# EAGLE board SmoothieDriver-DC3 (EAGLE 6.3)
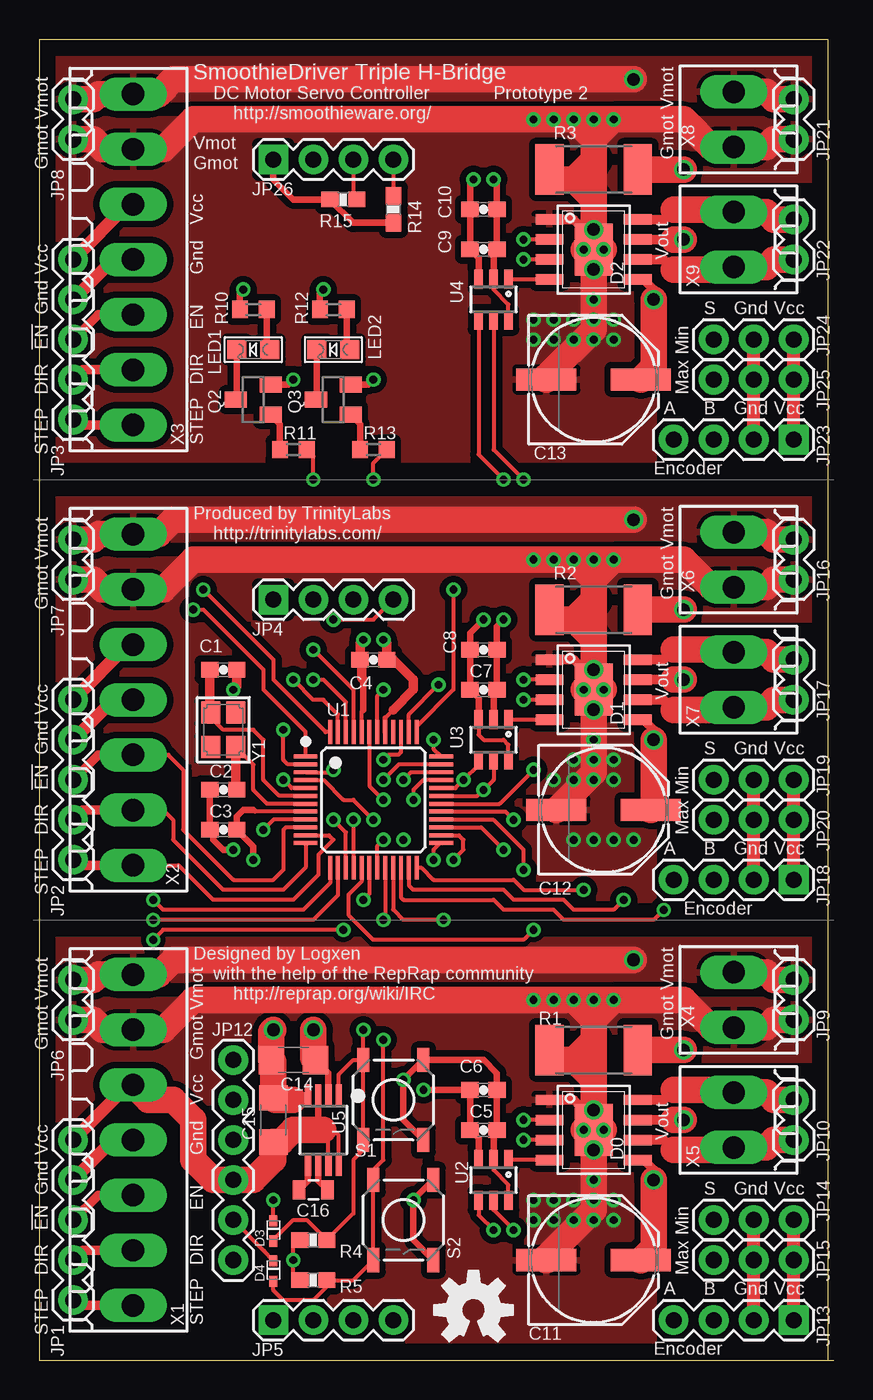
[diagram p0: board, top side]
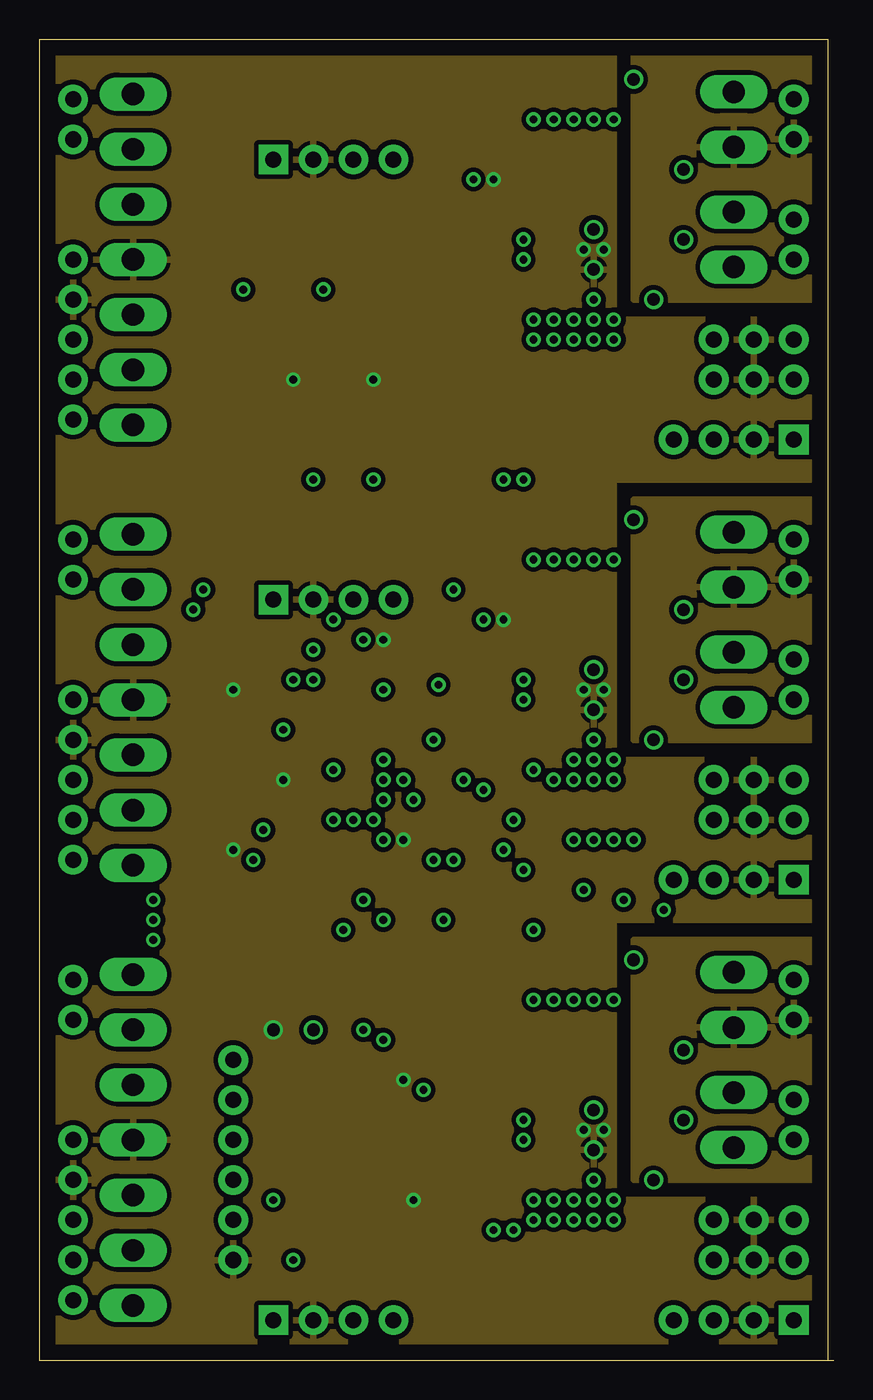
[diagram p1: board, inner layer Route2]
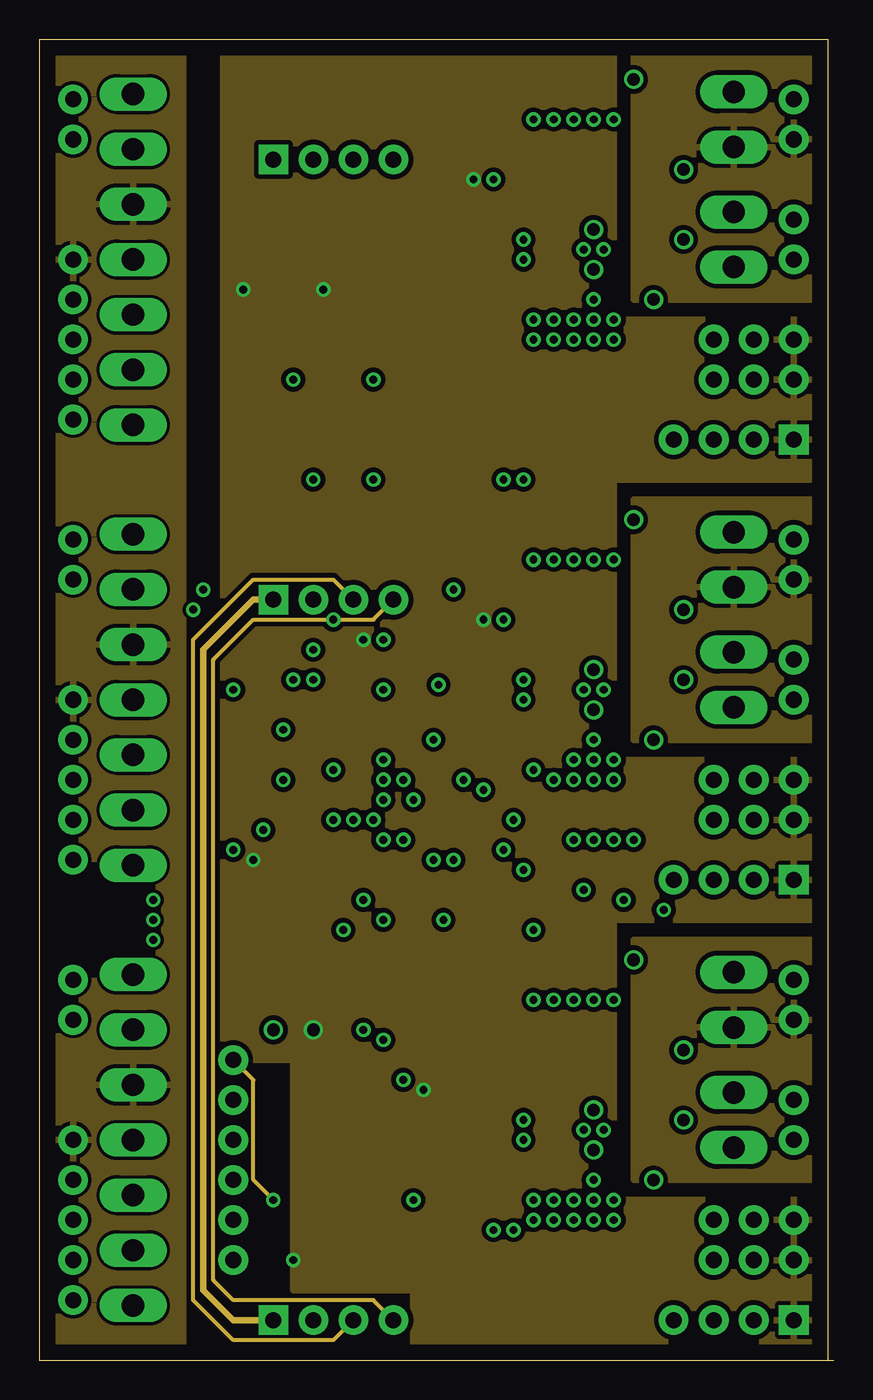
[diagram p2: board, inner layer Route3]
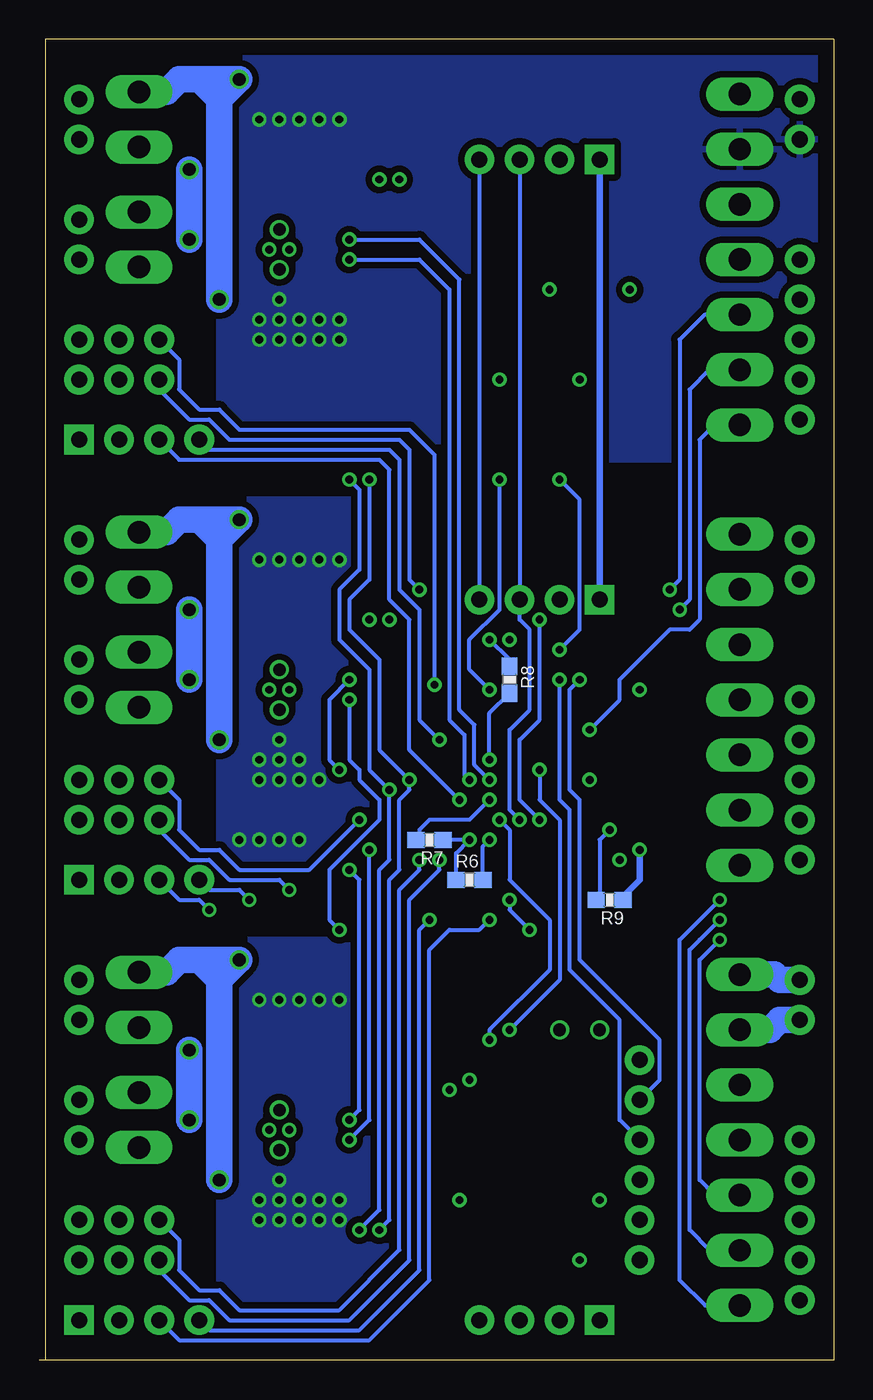
[diagram p3: board, bottom side, seen from below]

Size 50.38 x 83.82 mm. Coordinates in mm from the lower left corner, seen from the top.
Outline: 50,0 0,0 0,83.82 50,83.82 50,0
Outline: 50,0 50.38,0
Copper layers (1*2*3*16): Top 0.035mm / dielectric 0.5mm / Route2 0.017mm / dielectric 0.5mm / Route3 0.017mm / dielectric 0.5mm / Bottom 0.035mm
Design rules "default *": minimum track width 8mil, minimum drill 19mil, track to track 8mil, track to pad 8mil, pad to pad 8mil, via to via 8mil, smd to smd 0mil, copper to edge 40mil, drill to drill 8mil, minimum pad ring 8mil, minimum via ring 8mil, stop-mask expansion 4mil, vias tented up to drill 0mil, thermal gap 10mil

## Footprints (pad centres in the part's own frame; a part is rotated, then mirrored left to right if it is on the bottom)
0603-CAP = smd 1.1 x 1: 1 -0.85,0; 2 0.85,0
PANASONIC_E = smd 3.8 x 1.4: + 3,0; - -3,0
1206 = smd 1.6 x 1.8: 1 -1.4,0; 2 1.4,0
0805 = smd 0.8 x 1.2: 1 -0.9,0; 2 0.9,0
SOICN8-PAD = smd 0.65 x 1.75: 1 -1.905,-2.8; 2 -0.635,-2.8; 3 0.635,-2.8; 4 1.905,-2.8; 5 1.905,2.8; 6 0.635,2.8; 7 -0.635,2.8; 8 -1.905,2.8 | smd 3.3 x 2.41: PAD 0,0
NET_LINK = drill 0.8: P$1 0,0; P$2 0,0
SOD523 = smd 0.7 x 0.5: A 0.7,0; C -0.6,0
1X05 = drill 1.016 pad 1.88: 1 0,0; 2 2.54,0; 3 5.08,0; 4 7.62,0; 5 10.16,0
1X04 = drill 1.016 pad 1.88 square: 1 0,0 | drill 1.016 pad 1.88: 2 2.54,0; 3 5.08,0; 4 7.62,0
1X02 = drill 1.016 pad 1.88: 1 0,0; 2 2.54,0
1X06 = drill 1.016 pad 1.88: 1 0,0; 2 2.54,0; 3 5.08,0; 4 7.62,0; 5 10.16,0; 6 12.7,0
1X03 = drill 1.016 pad 1.88: 1 0,0; 2 2.54,0; 3 5.08,0
CHIPLED_0805 = smd 1.2 x 1.2: A 0,-1.05; C 0,1.05
SOT23 = smd 1 x 1.4: 1 -0.95,-1.1; 2 0.95,-1.1; 3 0,1.1
R2512 = smd 1.8 x 3.2: 1 -2.8,0; 2 2.8,0
0603-RES = smd 1.1 x 1: 1 -0.85,0; 2 0.85,0
R0603 = smd 1 x 1.1: 1 -0.85,0; 2 0.85,0
TACTILE_SWITCH_SMD = smd 1.524 x 0.762: 1 -2.54,1.905; 2 2.54,1.905; 3 -2.54,-1.905; 4 2.54,-1.905
LQFP48 = smd 1.5 x 0.25: 1 -4.3,2.75; 2 -4.3,2.25; 3 -4.3,1.75; 4 -4.3,1.25; 5 -4.3,0.75; 6 -4.3,0.25; 7 -4.3,-0.25; 8 -4.3,-0.75; 9 -4.3,-1.25; 10 -4.3,-1.75; 11 -4.3,-2.25; 12 -4.3,-2.75; 25 4.3,-2.75; 26 4.3,-2.25; 27 4.3,-1.75; 28 4.3,-1.25; 29 4.3,-0.75; 30 4.3,-0.25; 31 4.3,0.25; 32 4.3,0.75; 33 4.3,1.25; 34 4.3,1.75; 35 4.3,2.25; 36 4.3,2.75 | smd 0.25 x 1.5: 13 -2.75,-4.3; 14 -2.25,-4.3; 15 -1.75,-4.3; 16 -1.25,-4.3; 17 -0.75,-4.3; 18 -0.25,-4.3; 19 0.25,-4.3; 20 0.75,-4.3; 21 1.25,-4.3; 22 1.75,-4.3; 23 2.25,-4.3; 24 2.75,-4.3; 37 2.75,4.3; 38 2.25,4.3; 39 1.75,4.3; 40 1.25,4.3; 41 0.75,4.3; 42 0.25,4.3; 43 -0.25,4.3; 44 -0.75,4.3; 45 -1.25,4.3; 46 -1.75,4.3; 47 -2.25,4.3; 48 -2.75,4.3
SOT23-6 = smd 0.55 x 1.2: 1 -0.95,-1.3; 2 0,-1.3; 3 0.95,-1.3; 4 0.95,1.3; 5 0,1.3; 6 -0.95,1.3
MSOP8_0.65MM = smd 0.4 x 1.4: 1 -0.975,-2.2; 2 -0.325,-2.2; 3 0.325,-2.2; 4 0.975,-2.2; 5 0.975,2.2; 6 0.325,2.2; 7 -0.325,2.2; 8 -0.975,2.2
180-7 = drill 1.422 long: 1 -10.5,0; 2 -7,0; 3 -3.5,0; 4 0,0; 5 3.5,0; 6 7,0; 7 10.5,0
180-2 = drill 1.422 long: 1 -1.75,0; 2 1.75,0
CRYSTAL_3.2X2.5 = smd 1.4 x 1.2: 1 -1.1,-0.8; 2 1.1,0.8; GND1 -1.1,0.8; GND2 1.1,-0.8

## Placement (x,y rotation side)
C1  18pF  [0603-CAP]  11.66,43.81 180 top
C2  18pF  [0603-CAP]  11.66,36.2 0 top
C3  0.1uF  [0603-CAP]  11.66,33.66 0 top
C4  0.1uF  [0603-CAP]  21.19,44.45 180 top
C5  0.1uF  [0603-CAP]  28.18,14.61 0 top
C6  10uF  [0603-CAP]  28.18,17.14 0 top
C7  0.1uF  [0603-CAP]  28.18,42.55 0 top
C8  10uF  [0603-CAP]  28.18,45.09 0 top
C9  0.1uF  [0603-CAP]  28.18,70.48 0 top
C10  10uF  [0603-CAP]  28.18,73.03 0 top
C11  100uF  [PANASONIC_E]  35.16,6.35 0 top
C12  100uF  [PANASONIC_E]  35.8,34.92 0 top
C13  100uF  [PANASONIC_E]  35.16,62.23 0 top
C14  10uF  [1206]  16.11,19.05 180 top
C15  10uF  [1206]  14.84,15.24 90 top
C16  1uF  [0805]  17.38,10.79 180 top
D0  A4950  [SOICN8-PAD]  35.16,14.61 270 top
D0_GMOT  NET_LINK  [NET_LINK]  35.16,15.88 0 top
D1  A4950  [SOICN8-PAD]  35.16,42.55 270 top
D2  A4950  [SOICN8-PAD]  35.16,70.48 270 top
D3  1N4148  [SOD523]  14.84,8.26 270 top
D4  1N4148  [SOD523]  14.84,5.71 270 top
JP1  LOGIC_0  [1X05]  2.14,13.97 270 top
JP2  LOGIC_1  [1X05]  2.14,41.91 270 top
JP3  LOGIC_2  [1X05]  2.14,69.85 270 top
JP4  I2C  [1X04]  14.84,48.26 0 top
JP5  I2C  [1X04]  14.84,2.54 0 top
JP6  VMOT  [1X02]  2.14,24.13 270 top
JP7  VMOT  [1X02]  2.14,52.07 270 top
JP8  VMOT  [1X02]  2.14,80.01 270 top
JP9  D0_PWR  [1X02]  47.86,24.13 270 top
JP10  D0_OUT  [1X02]  47.86,13.97 90 top
JP12  UART  [1X06]  12.3,6.35 90 top
JP13  D0_ENC  [1X04]  47.86,2.54 180 top
JP14  D0_MIN  [1X03]  47.86,8.89 180 top
JP15  D0_MAX  [1X03]  47.86,6.35 180 top
JP16  D1_PWR  [1X02]  47.86,52.07 270 top
JP17  D1_OUT  [1X02]  47.86,41.91 90 top
JP18  D1_ENC  [1X04]  47.86,30.48 180 top
JP19  D1_MIN  [1X03]  47.86,36.83 180 top
JP20  D1_MAX  [1X03]  47.86,34.29 180 top
JP21  D2_PWR  [1X02]  47.86,80.01 270 top
JP22  D2_OUT  [1X02]  47.86,69.85 90 top
JP23  D2_ENC  [1X04]  47.86,58.42 180 top
JP24  D2_MIN  [1X03]  47.86,64.77 180 top
JP25  D2_MAX  [1X03]  47.86,62.23 180 top
JP26  I2C  [1X04]  14.84,76.2 0 top
LED1  20mA  [CHIPLED_0805]  13.57,64.14 90 top
LED2  20mA  [CHIPLED_0805]  18.65,64.14 90 top
Q2  25mA  [SOT23]  13.57,60.96 90 top
Q3  25mA  [SOT23]  18.65,60.96 90 top
R1  0.1 Ohm  [R2512]  35.16,19.68 0 top
R2  0.1 Ohm  [R2512]  35.16,47.62 0 top
R3  0.1 Ohm  [R2512]  35.16,75.56 0 top
R4  10kOhm  [0603-RES]  17.38,7.62 180 top
R5  10kOhm  [0603-RES]  17.38,5.08 180 top
R6  ADD0  [0603-RES]  23.1,30.48 0 bottom
R7  ADD1  [0603-RES]  25.64,33.02 180 bottom
R8  ADD2  [0603-RES]  20.55,43.18 270 bottom
R9  ADD3  [0603-RES]  14.21,29.21 180 bottom
R10  75 Ohm  [R0603]  13.57,66.67 0 top
R11  1200 Ohm  [R0603]  16.11,57.78 0 top
R12  75 Ohm  [R0603]  18.65,66.67 0 top
R13  1200 Ohm  [R0603]  21.19,57.78 0 top
R14  NP  [0603-RES]  22.46,73.03 270 top
R15  NP  [0603-RES]  19.29,73.66 180 top
S1  RESET  [TACTILE_SWITCH_SMD]  22.46,16.51 270 top
S2  ISP  [TACTILE_SWITCH_SMD]  23.1,8.89 270 top
U1  LPC1114FBD48  [LQFP48]  21.19,35.56 0 top
U2  MCP4725A0  [SOT23-6]  28.81,11.43 180 top
U3  MCP4725A0  [SOT23-6]  28.81,39.37 180 top
U4  MCP4725A1  [SOT23-6]  28.81,67.31 180 top
U5  MCP1252-33X40I/MS  [MSOP8_0.65MM]  18.02,14.61 180 top
U$15  OSHW-LOGOM  [OSHW-LOGO-M]  27.54,3.17 0 top
U$22  NET_LINK  [NET_LINK]  35.16,13.34 180 bottom
U$23  NET_LINK  [NET_LINK]  35.16,43.81 0 top
U$24  NET_LINK  [NET_LINK]  35.16,41.27 0 top
U$25  NET_LINK  [NET_LINK]  35.16,69.22 0 top
U$26  NET_LINK  [NET_LINK]  35.16,71.75 0 top
X1  DRIVER_0  [180-7]  5.95,13.97 270 top
X2  DRIVER_1  [180-7]  5.95,41.91 270 top
X3  DRIVER_2  [180-7]  5.95,69.85 270 top
X4  D0_PWR  [180-2]  44.05,22.86 90 top
X5  D0_OUT  [180-2]  44.05,15.24 90 top
X6  D1_PWR  [180-2]  44.05,50.8 90 top
X7  D1_OUT  [180-2]  44.05,43.18 90 top
X8  D2_PWR  [180-2]  44.05,78.74 90 top
X9  D2_OUT  [180-2]  44.05,71.12 90 top
Y1  12MHz  [CRYSTAL_3.2X2.5]  11.66,40.01 90 top

## Library data of the parts
C1-C16 = SparkFun-Capacitors
D0 D0_GMOT D1 D2 U5 U$22-U$26 = logxen
D3 D4 = SparkFun-DiscreteSemi
JP1-JP10 JP12-JP26 = SparkFun-Connectors
LED1 LED2 U1-U4 Y1 = microbuilder
Q2 Q3 = SparkFun
R1-R9 R14 R15 = SparkFun-Resistors
R10-R13 = rcl
S1 S2 = SparkFun-Electromechanical
U$15 = SparkFun-Aesthetics
X1-X9 = con-weidmueller-sl35; OC_FARNELL: unknown; OC_NEWARK: unknown

## Nets
ACC_SCL: U1.31 U2.5 U3.5 U4.5
ACC_SDA: U1.32 U2.4 U3.4 U4.4
ADD0: R6.2 U1.19
ADD1: R7.2 U1.43
ADD2: R8.2 U1.39
ADD3: R9.2 U1.9
D0_DIR: JP1.4 U1.14 X1.6
D0_EN: JP1.3 U1.18 X1.5
D0_ENC1: JP13.3 U1.20
D0_ENC2: JP13.4 U1.21
D0_GMOT: C11.- D0.1 D0_GMOT.P$1 JP6.2 JP9.2 X1.2 X4.1
D0_IN1: D0.3 U1.27
D0_IN2: D0.2 U1.28
D0_LSS: D0.7 R1.2
D0_MAX: JP15.3 U1.25
D0_MIN: JP14.3 U1.26
D0_OUT1: D0.6 JP10.1 X5.1
D0_OUT2: D0.8 JP10.2 X5.2
D0_STEP: JP1.5 U1.13 X1.7
D0_VMOT: C11.+ D0.5 JP6.1 JP9.1 X1.1 X4.2
D0_VREF: D0.4 U2.1
D1_DIR: JP2.4 U1.12 X2.6
D1_EN: JP2.3 U1.10 X2.5
D1_ENC1: JP18.3 U1.22
D1_ENC2: JP18.4 U1.23
D1_GMOT: C12.- D1.1 JP7.2 JP16.2 U$23.P$1 X2.2 X6.1
D1_IN1: D1.3 U1.17
D1_IN2: D1.2 U1.30
D1_LSS: D1.7 R2.2
D1_LSS1: D2.7 R3.2
D1_MAX: JP20.3 U1.24
D1_MIN: JP19.3 U1.29
D1_OUT1: D1.6 JP17.1 X7.1
D1_OUT2: D1.8 JP17.2 X7.2
D1_STEP: JP2.5 U1.11 X2.7
D1_VMOT: C12.+ D1.5 JP7.1 JP16.1 X2.1 X6.2
D1_VREF: D1.4 U3.1
D2_DIR: JP3.4 U1.1 X3.6
D2_EN: JP3.3 U1.48 X3.5
D2_ENC1: JP23.3 U1.33
D2_ENC2: JP23.4 U1.36
D2_GMOT: C13.- D2.1 JP8.2 JP21.2 U$26.P$1 X3.2 X8.1
D2_IN1: D2.3 U1.34
D2_IN2: D2.2 U1.35
D2_MAX: JP25.3 U1.37
D2_MIN: JP24.3 U1.38
D2_OUT1: D2.6 JP22.1 X9.1
D2_OUT2: D2.8 JP22.2 X9.2
D2_STEP: JP3.5 U1.2 X3.7
D2_VMOT: C13.+ D2.5 JP8.1 JP21.1 X3.1 X8.2
D2_VREF: D2.4 U4.1
DTR: D3.C JP12.6
GND: C1.1 C2.1 C3.1 C4.1 C5.2 C6.2 C7.2 C8.2 C9.2 C10.2 C14.2 C15.2 D0.PAD D0_GMOT.P$2 D1.PAD D2.PAD JP1.2 JP2.2 JP3.2 JP4.2 JP5.2 JP12.1 JP13.2 JP14.2 JP15.2 JP18.2 JP19.2 JP20.2 JP23.2 JP24.2 JP25.2 JP26.2 Q2.2 Q3.2 R1.1 R2.1 R3.1 R6.1 R7.1 R8.1 R9.1 S1.1 S1.2 S2.1 S2.2 U1.5 U1.41 U2.2 U2.6 U3.2 U4.2 U4.6 U5.4 U$22.P$1 U$22.P$2 U$23.P$2 U$24.P$1 U$24.P$2 U$25.P$1 U$25.P$2 U$26.P$2 X1.4 X2.4 X3.4
IRQ: U1.40
ISP: D4.A R5.1 S2.3 S2.4 U1.4
LED0: R11.2 U1.45
LED1: R13.2 U1.42
N$1: LED1.A R10.2
N$2: LED1.C Q2.3
N$6: Q2.1 R11.1
N$7: Q3.1 R13.1
N$9: LED2.A R12.2
N$10: LED2.C Q3.3
PWRREG_C+: C16.1 U5.6
PWRREG_C-: C16.2 U5.5
RESET: D3.A R4.1 S1.3 S1.4 U1.3 U5.1
RTS: D4.C JP12.2
RXD: JP12.4 U1.46
SCL: JP4.4 JP5.4 JP26.4 R14.1 U1.15
SDA: JP4.3 JP5.3 JP26.3 R15.1 U1.16
TXD: JP12.5 U1.47
VCC: C3.2 C4.2 C5.1 C6.1 C7.1 C8.1 C9.1 C10.1 C14.1 JP13.1 JP14.1 JP15.1 JP18.1 JP19.1 JP20.1 JP23.1 JP24.1 JP25.1 R4.2 R5.2 R10.1 R12.1 U1.8 U1.44 U2.3 U3.3 U3.6 U4.3 U5.2
VDD: JP4.1 JP5.1 JP26.1 R14.2 R15.2
VIN: C15.1 JP1.1 JP2.1 JP3.1 JP12.3 U5.3 U5.7 U5.8 X1.3 X2.3 X3.3
XTALIN: C1.2 U1.6 Y1.2
XTALOUT: C2.2 U1.7 Y1.1

## Tracks (layer width: path | path; a pad name or v marks a point on that pad's centre or on a via)
ACC_SCL  (via drill 0.5)
  Top 0.254: U4.5 28.81,57.78 v30.71,55.88 | U2.5 28.81,9.53 v30.08,8.26 | U1.31 27.79,35.81 v28.18,36.2 28.81,36.83 U3.5
  Bottom 0.254: v30.08,8.26 28.81,9.53 28.81,31.11 28.18,31.75 v28.18,36.2 29.45,37.47 29.45,43.81 31.35,45.72 31.35,48.9 30.08,50.16 30.08,55.24 v30.71,55.88
ACC_SDA  (via drill 0.5)
  Top 0.254: U4.4 27.86,57.47 v29.45,55.88 | U2.4 27.86,9.21 v28.81,8.26 | U3.4 27.86,37.78 v26.91,36.83 26.39,36.31 U1.32
  Bottom 0.254: v28.81,8.26 28.18,8.89 28.18,30.48 27.54,31.11 27.54,35.56 26.91,36.2 v26.91,36.83 28.81,38.73 28.81,44.45 30.71,46.35 30.71,48.26 29.45,49.53 v29.45,55.88
ADD0  (via drill 0.5)
  Top 0.254: U1.19 21.44,32.63 v21.83,33.02
  Bottom 0.254: 22.46,30.7 R6.2 22.25,32.6 v21.83,33.02
ADD1  (via drill 0.5)
  Top 0.254: U1.43 20.94,36.45 v21.83,35.56
  Bottom 0.254: v21.83,35.56 23.1,34.29 25.64,34.29 26.27,33.66 26.27,33.23 R7.2
ADD2  (via drill 0.5)
  Top 0.254: U1.39 22.94,38.58 22.78,38.42 22.14,38.42 v21.83,38.1
  Bottom 0.254: v21.83,38.1 21.83,41.06 R8.2
ADD3  (via drill 0.5)
  Top 0.254: U1.9 14.86,34.31 v14.21,33.66
  Bottom 0.254: v14.21,33.66 14.84,33.02 14.84,29.43 R9.2
D0_DIR  (via drill 0.5)
  Top 0.254: U1.14 18.94,29.5 17.38,27.94 v7.22,27.94
  Top 0.61: X1.6 2.76,6.97 JP1.4
  Bottom 0.254: X1.6 7.84,6.97 9.12,8.26 9.12,26.04 8.49,26.67 v7.22,27.94
D0_EN  (via drill 0.5)
  Top 0.254: U1.18 20.94,29.59 v20.55,29.21 | v19.29,27.3 7.86,27.3 v7.22,26.67
  Top 0.61: X1.5 3.72,10.47 JP1.3
  Bottom 0.254: X1.5 7.53,10.47 8.49,11.43 8.49,25.4 v7.22,26.67 | v20.55,29.21 20.55,28.57 v19.29,27.3
D0_ENC1  (via drill 0.5)
  Top 0.254: U1.20 21.94,28.05 v21.83,27.94
  Bottom 0.254: JP13.3 41.51,1.27 29.45,1.27 25.64,5.08 25.64,26.04 24.37,27.3 22.46,27.3 v21.83,27.94
D0_ENC2  (via drill 0.5)
  Top 0.254: v25.64,27.94 23.1,27.94 22.44,28.59 U1.21
  Bottom 0.254: JP13.4 39.61,1.91 30.08,1.91 26.27,5.71 26.27,27.3 v25.64,27.94
D0_GMOT  (via drill 0.5)
  Top 0.61: D0.1 33.89,16.51 34.52,15.88 D0_GMOT.P$1
  Top 1.676: JP9.2 46.59,21.59 46.11,21.11 X4.1 42.62,21.11 40.88,22.86 v36.43,22.86 | JP6.2 3.41,21.59 4.03,20.97 X1.2 7.87,20.97 9.76,22.86 v31.35,22.86 v32.62,22.86 v33.89,22.86 | v33.89,22.86 v35.16,22.86 v36.43,22.86 | C11.- 32.16,6.53 35.16,9.53 v35.16,10.16 v35.16,11.43 D0_GMOT.P$1 35.16,21.59 | v36.43,22.86 35.16,21.59 | v33.89,22.86 35.16,21.59
  Bottom 1.676: X1.2 4.03,20.97 3.41,21.59 JP6.2
  other vias: 31.35,8.89 31.35,10.16 32.62,10.16 32.62,8.89 33.89,8.89 33.89,10.16 35.16,8.89 36.43,8.89 36.43,10.16
  pour Route2 (isolate 0.305): 37.7,26.67 51.67,26.67 51.67,11.43 37.7,11.43
  pour Route3 (isolate 0.305): 37.7,26.67 51.67,26.67 51.67,11.43 37.7,11.43
  pour Top (isolate 0.406): -1.67,22.86 51.67,22.86 51.67,19.05 38.97,19.05 38.97,1.27 -1.67,1.27
  pour Bottom (isolate 0.406): 26.27,26.67 38.97,26.67 38.97,1.27 26.27,1.27
D0_IN1  (via drill 0.5)
  Top 0.254: D0.3 v30.71,13.97 | v29.45,32.38 28.02,33.81 U1.27
  Bottom 0.254: v30.71,13.97 29.45,15.24 v29.45,32.38
D0_IN2  (via drill 0.5)
  Top 0.254: D0.2 v30.71,15.24 | v30.71,31.11 30.71,32.38 28.79,34.31 U1.28
  Bottom 0.254: v30.71,15.24 30.08,15.88 30.08,30.48 v30.71,31.11
D0_LSS  (via drill 0.8)
  Top 0.61: D0.7 40.24,15.24
  Top 1.676: 40.24,15.24 v40.88,15.24 | v40.88,19.68 R1.2
  Bottom 1.676: v40.88,15.24 v40.88,19.68
D0_MAX  (via drill 0.5)
  Top 0.254: U1.25 25.43,32.81 25,32.38 v25,31.75
  Bottom 0.254: JP15.3 42.78,5.71 40.88,3.81 39.61,3.81 38.34,2.54 30.71,2.54 26.91,6.35 26.91,29.21 25,31.11 v25,31.75
D0_MIN  (via drill 0.5)
  Top 0.254: v26.27,31.75 26.91,32.38 26.91,33.02 26.62,33.31 U1.26
  Bottom 0.254: JP14.3 41.51,7.62 41.51,5.71 40.24,4.45 38.97,4.45 37.7,3.17 31.35,3.17 27.54,6.99 27.54,29.84 26.27,31.11 v26.27,31.75
D0_OUT1
  Top 0.61: D0.6 39.61,13.97 40.24,13.34
  Top 1.676: 40.24,13.34 43.9,13.34 X5.1 46.11,13.49 46.59,13.97 JP10.1
D0_OUT2
  Top 0.61: D0.8 39.61,16.51 40.24,17.14
  Top 1.676: 40.24,17.14 43.9,17.14 X5.2 46.11,16.99 46.59,16.51 JP10.2
D0_STEP  (via drill 0.5)
  Top 0.254: U1.13 18.44,30.27 16.75,28.57 7.86,28.57 v7.22,29.21
  Top 0.61: X1.7 2.48,3.47 JP1.5
  Bottom 0.254: X1.7 8.15,3.47 9.76,5.08 9.76,26.67 v7.22,29.21
D0_VMOT  (via drill 0.8)
  Top 0.61: D0.5 38.34,12.7 38.97,12.06 v38.97,11.43
  Top 1.676: X4.2 46.11,24.61 46.59,24.13 JP9.1 | JP6.1 3.41,24.13 3.75,24.47 X1.1 7.56,24.47 8.49,25.4 v37.7,25.4 | v38.97,11.43 38.97,7.16 C11.+
  Bottom 1.676: X1.1 3.75,24.47 3.41,24.13 JP6.1 | X4.2 42.3,24.61 41.51,25.4 40.24,25.4 | 40.24,25.4 v37.7,25.4 38.97,24.13 | 40.24,25.4 38.97,24.13 | 38.97,24.13 v38.97,11.43
  pour Top (isolate 0.305): -1.67,24.13 -1.67,26.67 51.67,26.67 51.67,24.13
D0_VREF
  Top 0.254: D0.4 29.79,12.7 U2.1
D1_DIR
  Top 0.254: X2.6 7.87,34.91 8.49,34.29 8.49,33.02 11.66,29.84 15.47,29.84 16.89,31.26 U1.12
  Top 0.61: X2.6 2.76,34.91 JP2.4
D1_EN
  Top 0.254: X2.5 8.18,38.41 9.12,37.47 9.12,33.66 12.3,30.48 14.84,30.48 15.47,31.11 15.47,33.66 15.63,33.81 U1.10
  Top 0.61: X2.5 3.72,38.41 JP2.3
D1_ENC1  (via drill 0.5)
  Top 0.254: v39.61,28.57 38.97,27.94 33.26,27.94 32.62,28.57 29.45,28.57 28.81,29.21 23.1,29.21 22.94,29.36 U1.22
  Bottom 0.254: JP18.3 41.51,29.21 40.24,29.21 v39.61,28.57
D1_ENC2  (via drill 0.5)
  Top 0.254: v37.07,29.21 36.43,28.57 33.89,28.57 33.26,29.21 30.08,29.21 29.45,29.84 23.73,29.84 23.44,30.14 U1.23
  Bottom 0.254: JP18.4 39.61,29.84 37.7,29.84 v37.07,29.21
D1_GMOT  (via drill 0.5)
  Top 0.61: D1.1 33.89,44.45 34.52,43.81 U$23.P$1
  Top 1.676: JP7.2 3.41,49.53 4.03,48.91 X2.2 7.87,48.91 9.76,50.8 v31.35,50.8 v32.62,50.8 v33.89,50.8 | JP16.2 46.59,49.53 46.11,49.05 X6.1 42.62,49.05 40.88,50.8 v36.43,50.8 | v33.89,50.8 v35.16,50.8 v36.43,50.8 | v36.43,50.8 35.16,49.53 | v33.89,50.8 35.16,49.53 | 35.16,49.53 U$23.P$1 v35.16,39.37 v35.16,38.1 35.16,37.29 C12.-
  other vias: 32.62,36.83 33.89,36.83 33.89,38.1 35.16,36.83 36.43,38.1 36.43,36.83 33.89,33.02 35.16,33.02 36.43,33.02 37.7,33.02
  pour Route2 (isolate 0.305): 37.7,54.61 51.67,54.61 51.67,39.37 37.7,39.37
  pour Route3 (isolate 0.305): 37.7,54.61 51.67,54.61 51.67,39.37 37.7,39.37
  pour Top (isolate 0.406): -1.67,50.8 51.67,50.8 51.67,46.99 38.97,46.99 38.97,29.21 -1.67,29.21
  pour Bottom (isolate 0.406): 26.27,54.61 26.27,27.94 38.97,27.94 38.97,54.61
D1_IN1  (via drill 0.5)
  Top 0.254: D1.3 v30.71,41.91 | v31.35,27.3 30.71,26.67 21.19,26.67 19.6,28.26 19.6,29.53 20.44,30.36 U1.17
  Bottom 0.254: v30.71,41.91 30.71,38.1 30.08,37.47 30.08,36.83 28.81,35.56 28.81,34.29 31.98,31.11 31.98,27.94 v31.35,27.3
D1_IN2  (via drill 0.5)
  Top 0.254: D1.2 v30.71,43.18 | v31.35,37.47 29.2,35.31 U1.30
  Bottom 0.254: v30.71,43.18 31.98,41.91 31.98,38.1 v31.35,37.47
D1_LSS  (via drill 0.8)
  Top 0.61: D1.7 40.24,43.18
  Top 1.676: 40.24,43.18 v40.88,43.18 | v40.88,47.62 R2.2
  Bottom 1.676: v40.88,43.18 v40.88,47.62
D1_LSS1  (via drill 0.8)
  Top 0.61: D2.7 40.24,71.12
  Top 1.676: 40.24,71.12 v40.88,71.12 | v40.88,75.56 R3.2
  Bottom 1.676: v40.88,71.12 v40.88,75.56
D1_MAX  (via drill 0.5)
  Top 0.254: U1.24 24.22,31.26 25,30.48 30.08,30.48 30.71,29.84 v34.52,29.84
  Bottom 0.254: JP20.3 42.78,33.66 40.88,31.75 39.61,31.75 38.34,30.48 35.16,30.48 v34.52,29.84
D1_MIN  (via drill 0.5)
  Top 0.254: U1.29 29.56,34.81 v30.08,34.29
  Bottom 0.254: JP19.3 41.51,35.56 41.51,33.66 40.24,32.38 38.97,32.38 37.7,31.11 33.26,31.11 32.62,31.75 v30.08,34.29
D1_OUT1
  Top 0.61: D1.6 39.61,41.91 40.24,41.27
  Top 1.676: JP17.1 46.59,41.91 46.11,41.43 X7.1 43.9,41.27 40.24,41.27
D1_OUT2
  Top 0.61: D1.8 39.61,44.45 40.24,45.09
  Top 1.676: JP17.2 46.59,44.45 46.11,44.93 X7.2 43.9,45.09 40.24,45.09
D1_STEP
  Top 0.254: X2.7 8.83,31.41 11.03,29.21 16.11,29.21 17.7,30.8 17.7,32.07 18.65,33.02 18.36,33.31 U1.11
  Top 0.61: X2.7 2.48,31.41 JP2.5
D1_VMOT  (via drill 0.8)
  Top 0.61: D1.5 38.34,40.64 38.97,40.01 v38.97,39.37
  Top 1.676: JP7.1 3.41,52.07 3.75,52.41 X2.1 7.56,52.41 8.49,53.34 v37.7,53.34 | X6.2 46.11,52.55 46.59,52.07 JP16.1 | v38.97,39.37 38.97,35.1 C12.+
  Bottom 1.676: 40.24,53.34 v37.7,53.34 38.97,52.07 | X6.2 42.3,52.55 41.51,53.34 40.24,53.34 | 40.24,53.34 38.97,52.07 | 38.97,52.07 v38.97,39.37
  pour Top (isolate 0.305): -1.67,54.61 51.67,54.61 51.67,52.07 -1.67,52.07
D1_VREF
  Top 0.254: D1.4 29.79,40.64 U3.1
D2_DIR  (via drill 0.5)
  Top 0.254: v9.76,47.62 10.39,47.62 14.21,43.81 14.21,42.55 16.89,39.86 U1.1
  Top 0.61: X3.6 2.76,62.85 JP3.4
  Bottom 0.254: X3.6 7.87,62.85 9.12,61.59 9.12,48.26 v9.76,47.62
D2_EN  (via drill 0.5)
  Top 0.254: v10.39,48.9 14.84,44.45 14.84,43.18 18.16,39.86 U1.48
  Top 0.61: X3.5 3.72,66.35 JP3.3
  Bottom 0.254: X3.5 8.18,66.35 9.76,64.77 9.76,49.53 v10.39,48.9
D2_ENC1  (via drill 0.5)
  Top 0.254: U1.33 24.35,36.81 23.73,36.2 v23.73,35.56
  Bottom 0.254: JP23.3 41.51,57.15 28.81,57.15 28.18,56.52 28.18,48.26 26.91,46.99 26.91,38.73 v23.73,35.56
D2_ENC2  (via drill 0.5)
  Top 0.254: v25,39.37 25,38.8 U1.36
  Bottom 0.254: JP23.4 39.61,57.78 28.18,57.78 27.54,57.15 27.54,48.9 26.27,47.62 26.27,40.64 v25,39.37
D2_GMOT  (via drill 0.5)
  Top 0.61: D2.1 33.89,72.39 34.52,71.75 U$26.P$1
  Top 1.676: JP8.2 3.41,77.47 4.03,76.85 X3.2 7.87,76.85 9.76,78.74 v31.35,78.74 v32.62,78.74 v33.89,78.74 | JP21.2 46.59,77.47 46.11,76.99 X8.1 42.62,76.99 40.88,78.74 v36.43,78.74 | v33.89,78.74 v35.16,78.74 v36.43,78.74 | C13.- 32.16,62.41 35.16,65.41 v35.16,66.04 v35.16,67.31 U$26.P$1 35.16,77.47 | v36.43,78.74 35.16,77.47 | v33.89,78.74 35.16,77.47
  other vias: 35.16,64.77 36.43,66.04 36.43,64.77 33.89,64.77 33.89,66.04 32.62,66.04 32.62,64.77 31.35,64.77 31.35,66.04
  pour Route2 (isolate 0.305): 37.7,85.09 51.67,85.09 51.67,67.31 37.7,67.31
  pour Route3 (isolate 0.305): 37.7,85.09 51.67,85.09 51.67,67.31 37.7,67.31
  pour Top (isolate 0.406): -1.67,78.74 51.67,78.74 51.67,74.93 38.97,74.93 38.97,57.15 -1.67,57.15
  pour Bottom (isolate 0.406): -1.67,85.09 38.97,85.09 38.97,57.15 -1.67,57.15
D2_IN1  (via drill 0.5)
  Top 0.254: D2.3 v30.71,69.85 | U1.34 23.58,37.31 v23.1,36.83
  Bottom 0.254: v30.71,69.85 26.27,69.85 24.37,67.94 24.37,40.64 23.41,39.69 23.41,37.15 v23.1,36.83
D2_IN2  (via drill 0.5)
  Top 0.254: D2.2 v30.71,71.12 | U1.35 22.8,37.81 v21.83,36.83
  Bottom 0.254: v30.71,71.12 26.27,71.12 23.73,68.58 23.73,41.27 22.78,40.32 22.78,37.78 v21.83,36.83
D2_MAX  (via drill 0.5)
  Top 0.254: v26.27,48.9 26.27,42.55 23.94,40.22 U1.37
  Bottom 0.254: JP25.3 42.78,61.59 40.88,59.69 39.61,59.69 38.34,58.42 27.54,58.42 26.91,57.78 26.91,49.53 v26.27,48.9
D2_MIN  (via drill 0.5)
  Top 0.254: U1.38 23.44,40.98 v25.32,42.86
  Bottom 0.254: JP24.3 41.51,63.5 41.51,61.59 40.24,60.33 38.97,60.33 37.7,59.05 26.91,59.05 25.32,57.47 v25.32,42.86
D2_OUT1
  Top 0.61: D2.6 39.61,69.85 40.24,69.22
  Top 1.676: JP22.1 46.59,69.85 46.11,69.37 X9.1 43.9,69.22 40.24,69.22
D2_OUT2
  Top 0.61: D2.8 39.61,72.39 40.24,73.03
  Top 1.676: JP22.2 46.59,72.39 46.11,72.87 X9.2 43.9,73.03 40.24,73.03
D2_STEP  (via drill 0.5)
  Top 0.254: U1.2 15.76,37.81 15.47,38.1 v15.47,40.01
  Top 0.61: X3.7 2.48,59.35 JP3.5
  Bottom 0.254: X3.7 7.56,59.35 8.49,58.42 8.49,46.99 9.12,46.35 10.39,46.35 13.57,43.18 13.57,41.91 v15.47,40.01
D2_VMOT  (via drill 0.8)
  Top 0.61: D2.5 38.34,68.58 38.97,67.94 v38.97,67.31
  Top 1.676: JP8.1 3.41,80.01 3.75,80.35 X3.1 7.56,80.35 8.49,81.28 v37.7,81.28 | X8.2 46.11,80.49 46.59,80.01 JP21.1 | v38.97,67.31 38.97,63.04 C13.+
  Bottom 1.676: X8.2 42.3,80.49 41.51,81.28 40.24,81.28 | 40.24,81.28 v37.7,81.28 38.97,80.01 | 40.24,81.28 38.97,80.01 | 38.97,80.01 v38.97,67.31
  pour Top (isolate 0.305): -1.67,82.55 51.67,82.55 51.67,80.01 -1.67,80.01
D2_VREF
  Top 0.254: D2.4 29.79,68.58 U4.1
DTR  (via drill 0.5)
  Top 0.254: D3.C v14.84,10.16
  Route3 0.254: v14.84,10.16 13.57,11.43 13.57,17.78 JP12.6
GND  (via drill 0.5, 0.8)
  Top 0.254: U4.6 29.76,67 28.81,67.94 U4.2 | U2.6 29.76,11.12 28.81,12.06 U2.2 | U1.5 15.99,36.31 v15.47,36.83 | 21.94,40.76 22.46,41.27
  Top 0.305: U1.41 21.94,40.76
  Top 0.406: U5.4 16.41,16.8 | S2.2 23.73,7.62 v23.73,10.16 S2.1 | S1.2 23.1,15.24 v23.1,17.78 S1.1 28.18,19.05 29.03,18.2 C6.2 C5.2 28.81,14.39 U2.2 | v28.81,74.93 29.03,74.72 C10.2 C9.2 28.81,70.27 U4.2 | U3.2 28.81,42.33 C7.2 C8.2 29.03,46.57 v29.45,46.99 | Q2.2 15.79,61.91 v16.11,62.23 | Q3.2 20.87,61.91 v21.19,62.23 | v12.3,32.38 11.66,32.38 11.03,33.02 11.03,33.44 C3.1 C2.1
  Top 0.61: 16.41,16.8 16.11,16.51 | 22.46,41.27 23.73,42.55 23.73,43.18 22.46,44.45 C4.1 22.04,45.51 v21.83,45.72 | C1.1 12.51,42.76 v12.3,42.55
  Top 0.813: X1.4 4.68,13.97 JP1.2 | X2.4 4.68,41.91 JP2.2 | X3.4 4.68,69.85 JP3.2 | JP18.2 JP20.2 JP19.2 | JP13.2 JP15.2 JP14.2 | JP23.2 JP25.2 JP24.2
  Top 1.676: D0.PAD U$22.P$2 35.16,17.78 | 35.16,41.91 U$24.P$2 35.16,45.72 33.89,46.99 | 35.16,41.91 D1.PAD | D2.PAD 35.16,71.12 | D2.PAD U$25.P$2 35.16,73.66 33.89,74.93 | U$23.P$2 D1.PAD | D0_GMOT.P$2 35.16,15.24 | 35.16,15.24 D0.PAD | 16.11,16.51 14.97,16.51 C15.2 14.84,18.92 C14.2 14.71,20.82 v14.84,20.95 | U$26.P$2 35.16,71.12 | 35.16,71.12 v34.52,70.48 | D2.PAD v35.8,70.48 | v34.52,42.55 35.16,41.91 | v34.52,14.61 35.16,15.24 | D0.PAD v35.8,14.61 | D1.PAD v35.8,42.55 | 35.16,17.78 35.16,20.32 33.89,19.05 | 35.16,17.78 33.89,19.05 | 33.89,19.05 33,19.05 R1.1 | 35.16,48.26 33.89,46.99 | 33.89,46.99 33,46.99 R2.1 | 35.16,76.2 33.89,74.93 | 33.89,74.93 33,74.93 R3.1
  Bottom 0.254: R6.1 23.95,32.17 v23.1,33.02 R7.1 | R8.1 20.55,44.45 v21.83,45.72
  Bottom 0.406: R9.1 13.36,29.43 12.3,30.48 v12.3,32.38
  pour Route2 (isolate 0.305): -1.67,-1.27 51.67,-1.27 51.67,10.16 36.43,10.16 36.43,27.94 51.67,27.94 51.67,38.1 36.43,38.1 36.43,55.88 51.67,55.88 51.67,66.04 36.43,66.04 36.43,85.09 -1.67,85.09
ISP  (via drill 0.5)
  Top 0.254: 18.65,5.08 R5.1 | v21.83,20.32 21.83,12.7 21.19,12.06 S2.3 S2.4 19.92,5.08 R5.1 | U1.4 18.04,36.81 19.29,35.56 19.92,35.56 v21.19,34.29 | R5.1 18.23,4.66 17.38,3.81 15.47,3.81 14.84,4.45 D4.A
  Bottom 0.254: v21.19,34.29 20.55,33.66 20.55,30.48 18.02,27.94 18.02,24.77 21.83,20.95 v21.83,20.32
LED0  (via drill 0.5)
  Top 0.254: U1.45 19.94,42.52 v17.38,45.09 | v17.38,55.88 17.38,57.37 R11.2
  Bottom 0.254: v17.38,45.09 16.11,46.35 16.11,54.61 v17.38,55.88
LED1  (via drill 0.5)
  Top 0.254: U1.42 21.44,42.16 v21.83,42.55 | v21.19,55.88 21.19,56.94 R13.2
  Bottom 0.254: v21.19,55.88 21.19,47.62 23.1,45.72 23.1,43.81 v21.83,42.55
N$1
  Top 0.406: R10.2 14.42,64.33 LED1.A
N$2
  Top 0.406: LED1.C 12.52,61.01 Q2.3
N$6
  Top 0.406: R11.1 15.26,59.42 Q2.1
N$7
  Top 0.406: R13.1 20.34,59.42 Q3.1
N$9
  Top 0.406: R12.2 19.5,64.33 LED2.A
N$10
  Top 0.406: LED2.C 17.6,61.01 Q3.3
PWRREG_C+
  Top 0.406: U5.6 17.69,11.38 C16.1
PWRREG_C-
  Top 0.406: U5.5 17.04,11.36 C16.2
RESET  (via drill 0.5)
  Top 0.254: S1.3 S1.4 20.55,13.34 19.92,12.7 19.92,9.31 R4.1 16.96,8.89 16.11,8.89 14.84,7.62 D3.A | U5.1 18.99,18.12 19.92,19.05 S1.3 | S1.3 v20.55,20.95 | U1.3 18.5,37.31 v18.65,37.47
  Bottom 0.254: v20.55,20.95 17.38,24.13 17.38,34.29 18.65,35.56 v18.65,37.47
RTS
  Top 0.254: D4.C 14.24,6.95 JP12.2
RXD  (via drill 0.5)
  Top 0.254: v17.38,43.18 18.02,43.18 19.44,41.76 U1.46
  Bottom 0.254: JP12.4 13.57,15.24 13.57,21.59 16.75,24.77 16.75,34.92 17.38,35.56 v17.38,43.18
SCL  (via drill 0.5)
  Top 0.254: U1.15 19.44,33.5 v18.65,34.29 | v18.65,46.99 21.19,46.99 JP4.4 | JP26.4 R14.1
  Route3 0.254: JP5.4 21.19,3.81 12.3,3.81 11.03,5.08 11.03,44.45 13.57,46.99 21.19,46.99 JP4.4
  Bottom 0.254: JP26.4 JP4.4 | v18.65,34.29 19.92,35.56 19.92,39.37 18.65,40.64 v18.65,46.99
SDA  (via drill 0.5)
  Top 0.254: U1.16 19.94,34.27 v19.92,34.29 | JP26.3 19.92,73.88 R15.1
  Route3 0.254: JP5.3 18.65,1.27 12.3,1.27 9.76,3.81 9.76,45.72 13.57,49.53 18.65,49.53 JP4.3
  Bottom 0.254: JP26.3 JP4.3 19.92,46.99 19.29,46.35 19.29,41.27 20.55,40.01 20.55,34.92 v19.92,34.29
TXD  (via drill 0.5)
  Top 0.254: v16.11,43.18 17.38,41.91 18.02,41.91 18.94,40.98 U1.47
  Bottom 0.254: JP12.5 11.03,17.78 11.03,20.32 16.11,25.4 16.11,35.56 16.75,36.2 16.75,42.55 v16.11,43.18
VCC  (via drill 0.5, 0.8)
  Top 0.254: U3.6 29.76,39.05 29.45,39.37 28.18,39.37 27.86,39.69 U3.3 | R5.2 16.11,5.08 v16.11,6.35 16.11,7.62 R4.2 | U1.44 20.44,41.16 20.55,41.27 | U1.8 13.69,34.81 13.57,34.92
  Top 0.406: U5.2 18.34,18.22 C14.1 | v24.37,17.14 C6.1 C5.1 27.86,14.07 U2.3 | v27.54,74.93 27.33,74.72 C10.1 C9.1 27.86,69.95 U4.3 | U3.3 27.86,42.01 C7.1 C8.1 27.33,46.14 v28.18,46.99 | 20.55,41.27 20.55,43.18 | R10.1 12.72,67.73 v12.94,67.94 | R12.1 17.8,67.73 v18.02,67.94 | v13.57,31.75 13.57,32.6 C3.2 12.51,34.51 12.94,34.92 13.57,34.92
  Top 0.61: v20.55,45.72 20.34,45.51 C4.2 20.44,44.35 20.44,43.3 20.55,43.18
  Top 0.813: JP18.1 JP20.1 JP19.1 | JP13.1 JP15.1 JP14.1 | JP23.1 JP25.1 JP24.1
  Top 1.676: C14.1 17.38,19.18 v17.38,20.95
  pour Route3 (isolate 0.305): 23.73,-1.27 51.67,-1.27 51.67,10.16 36.43,10.16 36.43,27.94 51.67,27.94 51.67,38.1 36.43,38.1 36.43,55.88 51.67,55.88 51.67,66.04 36.43,66.04 36.43,85.09 11.66,85.09 11.66,19.05 16.11,19.05 16.11,4.45 23.73,4.45
VDD
  Top 0.406: JP26.1 14.84,74.93 16.11,73.66 R15.2 19.92,72.17 R14.2
  Route3 0.406: JP4.1 13.57,48.26 10.39,45.09 10.39,4.45 12.3,2.54 JP5.1
  Bottom 0.406: JP4.1 JP26.1
VIN
  Top 0.254: U5.8 18.99,14.27 18.65,14.61 18.02,14.61 18.34,14.28 U5.7
  Top 0.406: U5.3 17.69,14.93 18.02,14.61
  Top 0.813: X1.3 5.64,17.47 JP1.1 | X2.3 5.64,45.41 JP2.1 | X3.3 5.64,73.35 JP3.1
  Top 1.676: 18.02,14.61 16.11,14.61 15.34,13.84 C15.1 14.84,12.7 13.57,11.43 JP12.3 11.03,11.43 9.76,12.7 9.76,15.24 8.49,16.51 6.91,16.51 X1.3
  pour Route3: -1.67,85.09 9.12,85.09 9.12,-1.27 -1.67,-1.27
XTALIN
  Top 0.254: U1.6 15.22,35.81 14.21,36.83 14.21,39.37 13.57,40.01 11.66,40.01 11.03,40.64 11.03,40.94 Y1.2
  Top 0.61: C1.2 10.81,41.16 Y1.2
XTALOUT
  Top 0.254: U1.7 14.46,35.31 13.57,36.2 13.57,37.8 Y1.1
  Top 0.61: Y1.1 12.46,36.24 C2.2

## Text on the board
tNames: SmoothieDriver Triple H-Bridge | DC Motor Servo Controller | Prototype 2 | Vmot | http://smoothieware.org/ | Vmot | Vmot | Gmot | Gmot | Gmot | Vcc | Vout | Vcc | Gnd | Gnd | S | Gnd | Vcc | !EN! | !EN! | Min | DIR | DIR | Max | A | B | Gnd | Vcc | STEP | STEP | Encoder | Produced by TrinityLabs | http://trinitylabs.com/ | Vmot | Vmot | Gmot | Gmot | Vout | Vcc | Gnd | S | Gnd | Vcc | !EN! | Min | DIR | Max | A | B | Gnd | Vcc | STEP | Encoder | Designed by Logxen | with the help of the RepRap community | Vmot | http://reprap.org/wiki/IRC | Vmot | Vmot | Gmot | Gmot | Gmot | Vcc | Vout | Vcc | Gnd | Gnd | !EN! | S | Gnd | Vcc | !EN! | Min | DIR | DIR | Max | A | B | Gnd | Vcc | STEP | STEP | Encoder